# Altium PCB Micromouse2019.PcbDoc (part 2 of 2)
Units mm, origin at the board's own origin, x right, y up, seen from the top; angles counter-clockwise.
Board outline 86.36 x 54.61 mm, 2 copper layers (Top Layer, Bottom Layer), stack 1.58 mm thick; 84 components, 88 nets, 396 pads, 110 vias.
Unrouted connection lines stored in the file: 1.
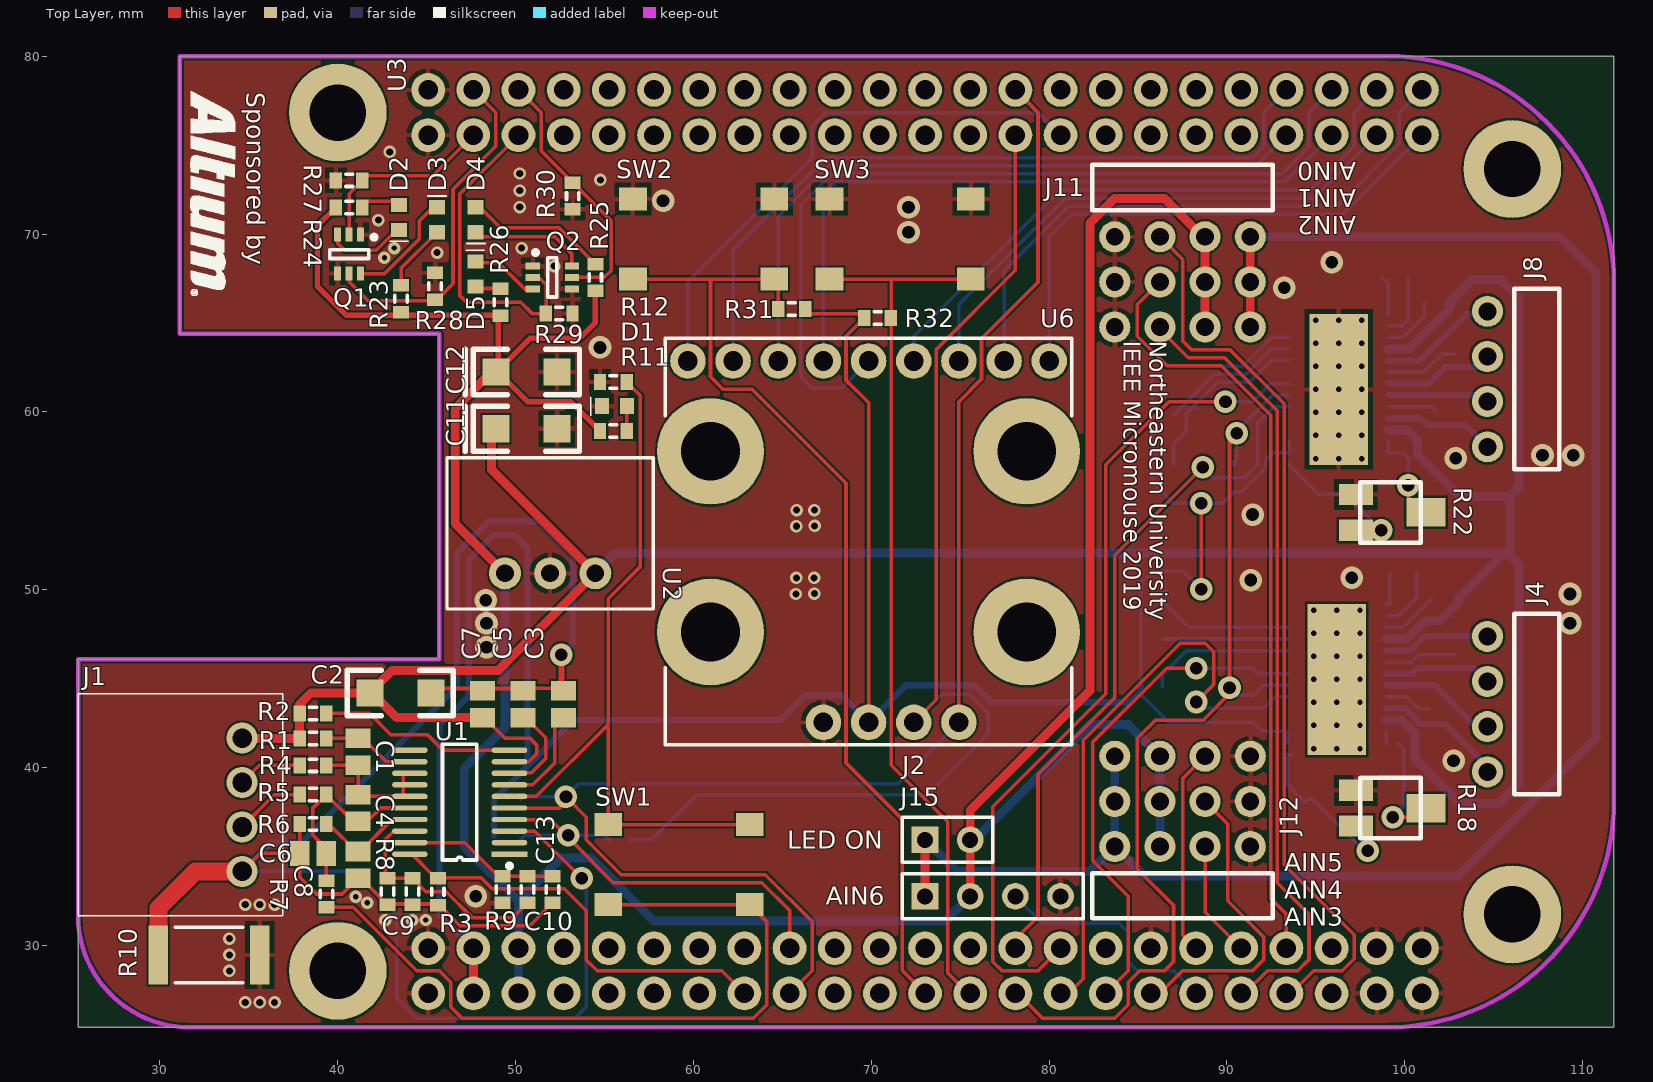
[diagram p0: Top Layer view]

## Silkscreen, mask and mechanical layers (free items; w line width, h text height) (continued)
Drill Drawing: (continued)
  text "Description" at 201.104,156.909 h1.83
  text "Hole Tolerance (+)" at 222.79,156.909 h1.83
  text "Hole Tolerance (-)" at 256.663,156.909 h1.83
  text "4" at 29.55,153.099 h1.52
  text "3.175mm (125.00mil)" at 44.786,153.099 h1.52
  text "PTH" at 73.987,153.099 h1.52
  text "Round" at 86.836,153.099 h1.52
  text "Top Layer - Bottom Layer" at 105.475,153.099 h1.52
  text "Pad" at 143.564,153.099 h1.52
  text "Rounded" at 158.546,153.099 h1.52
  text "c550h318" at 177.489,153.099 h1.52
  text "4" at 29.55,149.288 h1.52
  text "3.300mm (129.92mil)" at 44.786,149.288 h1.52
  text "PTH" at 73.987,149.288 h1.52
  text "Round" at 86.836,149.288 h1.52
  text "Top Layer - Bottom Layer" at 105.475,149.288 h1.52
  text "Pad" at 143.564,149.288 h1.52
  text "Rounded" at 158.546,149.288 h1.52
  text "c600h330" at 177.489,149.288 h1.52
  text "6" at 29.55,145.478 h1.52
  text "0.900mm (35.43mil)" at 44.786,145.478 h1.52
  text "PTH" at 73.987,145.478 h1.52
  text "Round" at 86.836,145.478 h1.52
  text "Top Layer - Bottom Layer" at 105.475,145.478 h1.52
  text "Pad" at 143.564,145.478 h1.52
  text "(Mixed)" at 158.546,145.478 h1.52
  text "(Mixed)" at 177.489,145.478 h1.52
  text "8" at 29.55,141.668 h1.52
  text "1.016mm (40.00mil)" at 44.786,141.668 h1.52
  text "PTH" at 73.987,141.668 h1.52
  text "Round" at 86.836,141.668 h1.52
  text "Top Layer - Bottom Layer" at 105.475,141.668 h1.52
  text "Pad" at 143.564,141.668 h1.52
  text "Rounded" at 158.546,141.668 h1.52
  text "c175h102" at 177.489,141.668 h1.52
  text "17" at 29.55,137.858 h1.52
  text "0.711mm (28.00mil)" at 44.786,137.858 h1.52
  text "PTH" at 73.987,137.858 h1.52
  text "Round" at 86.836,137.858 h1.52
  text "Top Layer - Bottom Layer" at 105.475,137.858 h1.52
  text "Via" at 143.564,137.858 h1.52
  text "Rounded" at 158.546,137.858 h1.52
  text "v127h71m0mx0(1)" at 177.489,137.858 h1.52
  text "18" at 29.55,134.048 h1.52
  text "0.711mm (27.99mil)" at 44.786,134.048 h1.52
  text "PTH" at 73.987,134.048 h1.52
  text "Round" at 86.836,134.048 h1.52
  text "Top Layer - Bottom Layer" at 105.475,134.048 h1.52
  text "Via" at 143.564,134.048 h1.52
  text "Rounded" at 158.546,134.048 h1.52
  text "v127h71m0mx0" at 177.489,134.048 h1.52
  text "26" at 29.55,130.238 h1.52
  text "0.400mm (15.75mil)" at 44.786,130.238 h1.52
  text "PTH" at 73.987,130.238 h1.52
  text "Round" at 86.836,130.238 h1.52
  text "Top Layer - Bottom Layer" at 105.475,130.238 h1.52
  text "Via" at 143.564,130.238 h1.52
  text "Rounded" at 158.546,130.238 h1.52
  text "v70h40m0mx0" at 177.489,130.238 h1.52
  text "27" at 29.55,126.428 h1.52
  text "1.000mm (39.37mil)" at 44.786,126.428 h1.52
  text "PTH" at 73.987,126.428 h1.52
  text "Round" at 86.836,126.428 h1.52
  text "Top Layer - Bottom Layer" at 105.475,126.428 h1.52
  text "Pad" at 143.564,126.428 h1.52
  text "Rounded" at 158.546,126.428 h1.52
  text "(Mixed)" at 177.489,126.428 h1.52
  text "49" at 29.55,122.618 h1.52
  text "0.300mm (11.81mil)" at 44.786,122.618 h1.52
  text "PTH" at 73.987,122.618 h1.52
  text "Round" at 86.836,122.618 h1.52
  text "Top Layer - Bottom Layer" at 105.475,122.618 h1.52
  text "Via" at 143.564,122.618 h1.52
  text "Rounded" at 158.546,122.618 h1.52
  text "(Mixed)" at 177.489,122.618 h1.52
  text "109" at 29.55,118.808 h1.52
  text "1.100mm (43.31mil)" at 44.786,118.808 h1.52
  text "PTH" at 73.987,118.808 h1.52
  text "Round" at 86.836,118.808 h1.52
  text "Top Layer - Bottom Layer" at 105.475,118.808 h1.52
  text "Pad" at 143.564,118.808 h1.52
  text "Rounded" at 158.546,118.808 h1.52
  text "(Mixed)" at 177.489,118.808 h1.52
  text "268 Total" at 29.55,114.998 h1.52